# Allegro board kvp_03v3.brd
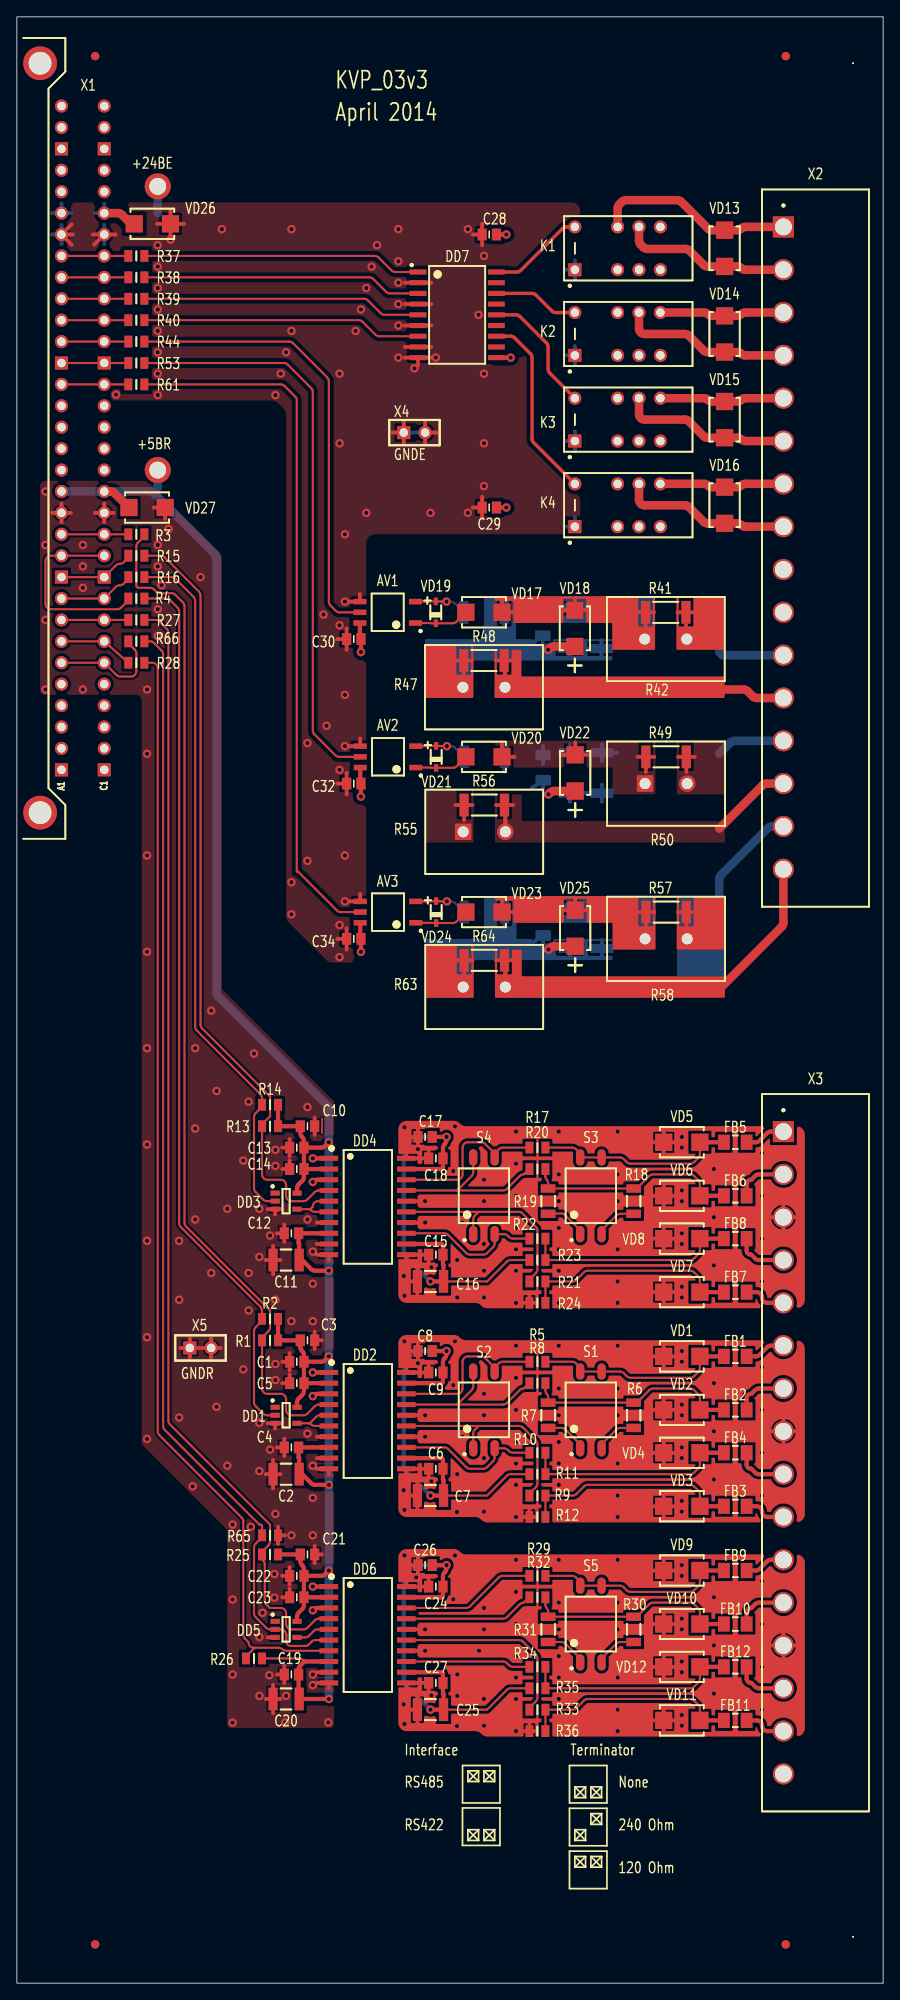
[diagram p0: board, top side]
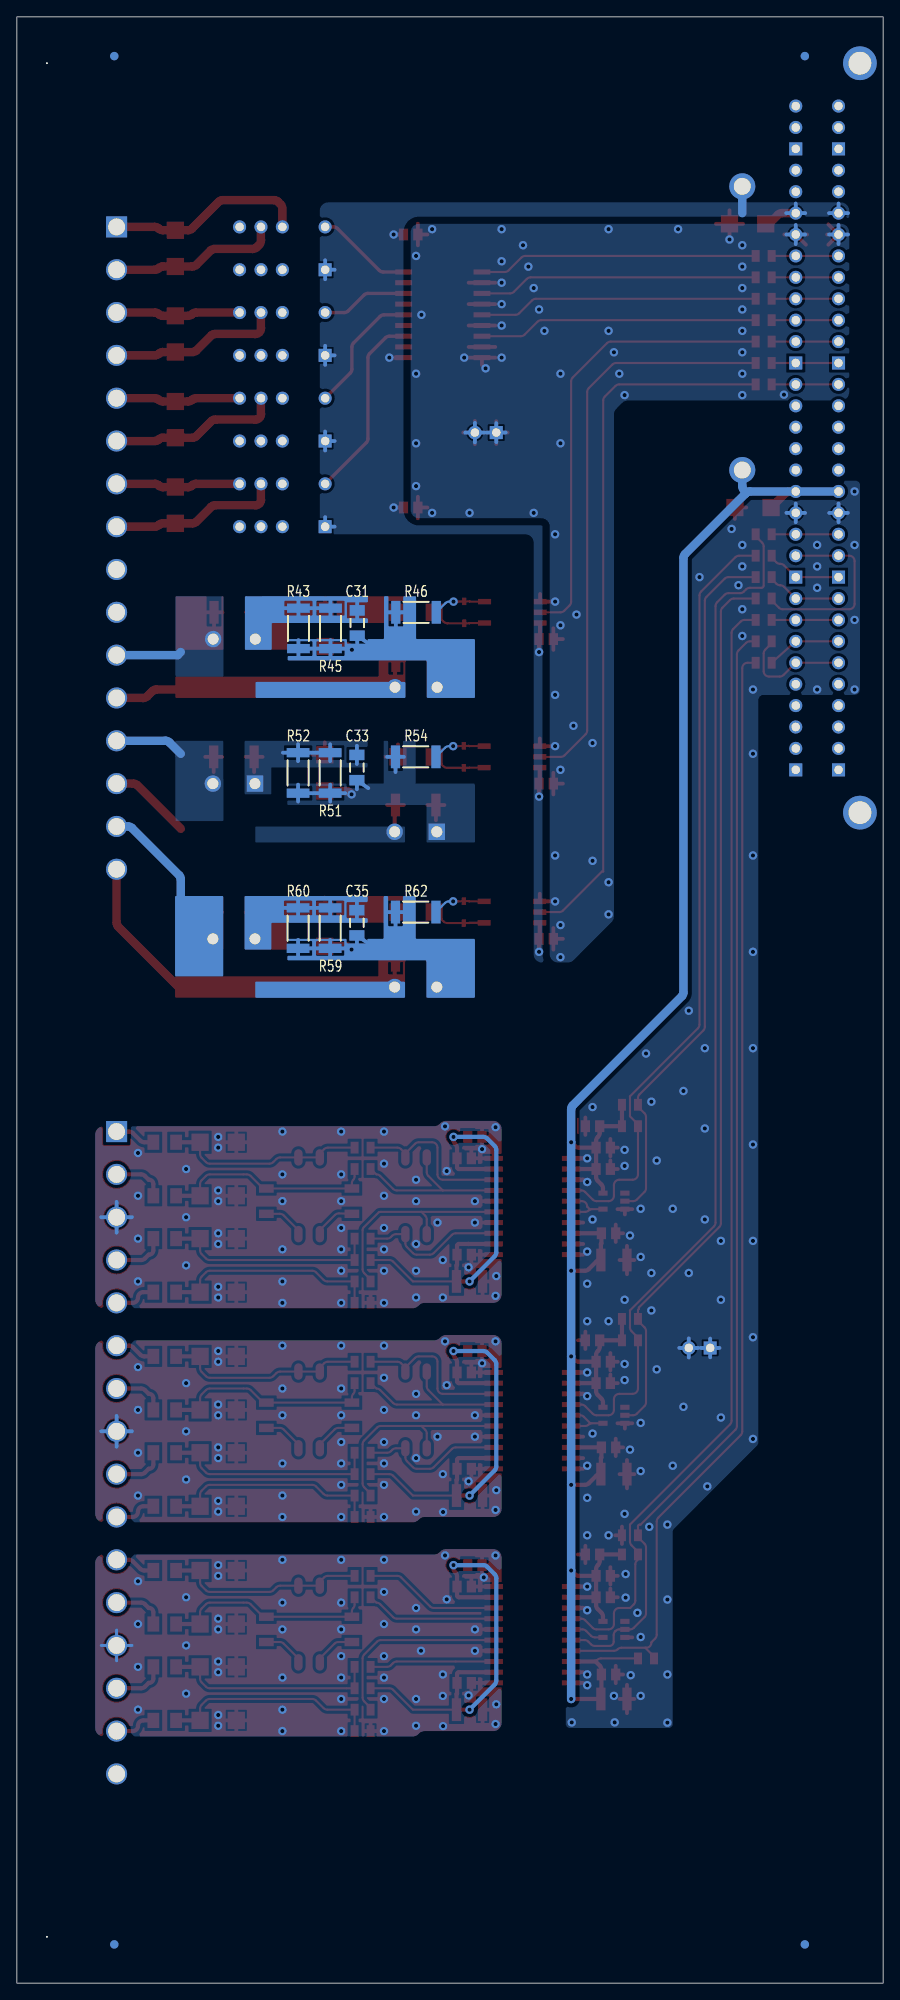
[diagram p1: board, bottom side, seen from below]

Outline 102.87 x 233.25 mm; copper layers: TOP, BOTTOM. Coordinates in mm from the lower left corner of the outline.
Outline path: rectangle 0,0 102.87,233.25

## Design rules (mm)
net group PWR: nets +5BR

## Placement (name value [footprint] x y rotation side)
AV1  ACPL-M50L-500E  [SOIC127P650X260-5]  44.04 162.61 180 top
AV2  ACPL-M50L-500E  [SOIC127P650X260-5]  44.08 145.47 180 top
AV3  ACPL-M50L-500E  [SOIC127P650X260-5]  44.08 127.05 180 top
C1  0.1u  [CAPC2013X95N]  33.24 73.71 180 top
C2  10.0u  [CAPC3225X220N]  31.97 60.38 180 top
C3  0.1u  [CAPC2013X95N]  34.51 76.25 0 top
C4  0.1u  [CAPC2013X95N]  32.61 63.55 180 top
C5  0.01u  [CAPC2013X95N]  33.24 71.17 180 top
C6  0.1u  [CAPC2013X95N]  49.75 61.01 180 top
C7  10.0u  [CAPC3225X220N]  49.12 57.84 180 top
C8  0.01u  [CAPC2013X95N]  48.48 74.98 180 top
C9  0.1u  [CAPC2013X95N]  49.75 72.44 180 top
C10  0.1u  [CAPC2013X95N]  34.51 101.65 0 top
C11  10.0u  [CAPC3225X220N]  31.97 85.78 180 top
C12  0.1u  [CAPC2013X95N]  32.61 88.95 180 top
C13  0.1u  [CAPC2013X95N]  33.24 99.11 180 top
C14  0.01u  [CAPC2013X95N]  33.24 96.57 180 top
C15  0.1u  [CAPC2013X95N]  49.75 86.41 180 top
C16  10.0u  [CAPC3225X220N]  49.12 83.24 180 top
C17  0.01u  [CAPC2013X95N]  48.48 100.38 180 top
C18  0.1u  [CAPC2013X95N]  49.75 97.84 180 top
C19  0.1u  [CAPC2013X95N]  32.61 36.62 180 top
C20  10.0u  [CAPC3225X220N]  31.97 33.71 180 top
C21  0.1u  [CAPC2013X95N]  34.51 50.85 0 top
C22  0.1u  [CAPC2013X95N]  33.24 48.31 180 top
C23  0.01u  [CAPC2013X95N]  33.24 45.77 180 top
C24  0.1u  [CAPC2013X95N]  49.75 47.04 180 top
C25  10.0u  [CAPC3225X220N]  49.12 32.44 180 top
C26  0.01u  [CAPC2013X95N]  48.48 49.58 180 top
C27  0.1u  [CAPC2013X95N]  49.75 35.61 180 top
C28  0.1u  [CAPC2013X95N]  56.1 207.43 180 top
C29  0.1u  [CAPC2013X95N]  56.1 175.05 180 top
C30  0.1u  [CAPC2013X95N]  40.01 159.44 180 top
C31  0.1u  [CAPC3216X145N]  62.45 161.34 270 bottom
C32  0.1u  [CAPC2013X95N]  40.01 142.29 180 top
C33  0.1u  [CAPC3216X145N]  62.49 144.2 270 bottom
C34  0.1u  [CAPC2013X95N]  40.01 123.88 180 top
C35  0.1u  [CAPC3216X145N]  62.49 125.78 270 bottom
DD1  SN74LVC1G14DBV  [SOT95P280X145-5N]  31.97 67.36 0 top
DD2  ADM2587  [SOIC127P1032X265-20]  37.05 72.44 270 top
DD3  SN74LVC1G14DBV  [SOT95P280X145-5N]  31.97 92.76 0 top
DD4  ADM2587  [SOIC127P1032X265-20]  37.05 97.84 270 top
DD5  SN74LVC1G14DBV  [SOT95P280X145-5N]  31.97 41.96 0 top
DD6  ADM2587  [SOIC127P1032X265-20]  37.05 47.04 270 top
DD7  ULN2803A  [SOIC127P1030X265-18N]  52.29 197.91 0 top
FB1  BLM31P  [FB3216X130N]  85.31 74.35 0 top
FB2  BLM31P  [FB3216X130N]  85.31 68 0 top
FB3  BLM31P  [FB3216X130N]  85.31 56.57 0 top
FB4  BLM31P  [FB3216X130N]  85.31 62.92 0 top
FB5  BLM31P  [FB3216X130N]  85.31 99.75 0 top
FB6  BLM31P  [FB3216X130N]  85.31 93.4 0 top
FB7  BLM31P  [FB3216X130N]  85.31 81.97 0 top
FB8  BLM31P  [FB3216X130N]  85.31 88.32 0 top
FB9  BLM31P  [FB3216X130N]  85.31 48.95 0 top
FB10  BLM31P  [FB3216X130N]  85.31 42.6 0 top
FB11  BLM31P  [FB3216X130N]  85.31 31.17 0 top
FB12  BLM31P  [FB3216X130N]  85.31 37.52 0 top
K1  FX2  [RELAY_FX2]  72.58 205.79 90 top
K2  FX2  [RELAY_FX2]  72.58 195.63 90 top
K3  FX2  [RELAY_FX2]  72.58 185.47 90 top
K4  FX2  [RELAY_FX2]  72.58 175.31 90 top
MH1  1.8mm  [MTG_180_310]  16.73 213.15 0 top
MH2  1.8mm  [MTG_180_310]  16.73 179.49 0 top
NOREF  -  [unnamed]  9.3 4.59 0 top
NOREF#2  -  [unnamed#2]  99.3 5.5 0 top
NOREF#3  -  [unnamed]  9.3 228.6 0 top
NOREF#4  -  [unnamed#2]  99.3 227.75 0 top
NOREF#5  -  [unnamed]  91.3 228.6 0 top
NOREF#6  -  [unnamed]  91.3 4.59 0 top
NOREF#7  -  [unnamed]  9.3 4.59 180 bottom
NOREF#8  -  [unnamed]  91.3 4.59 180 bottom
NOREF#9  -  [unnamed]  91.3 228.6 180 bottom
NOREF#10  -  [unnamed]  9.3 228.6 180 bottom
R1  10k  [RESC2013X60N]  30.06 76.25 0 top
R2  10k  [RESC2013X60N]  30.06 78.79 0 top
R3  100  [RESC2013X60N]  14.19 171.87 0 top
R4  100  [RESC2013X60N]  14.19 164.25 0 top
R5  10  [RESC2013X60N]  61.82 73.71 0 top
R6  240  [RESC3116X65N]  73.25 67.36 270 top
R7  240  [RESC3116X65N]  63.09 67.36 270 top
R8  10  [RESC2013X60N]  61.82 71.17 0 top
R9  10  [RESC2013X60N]  61.82 57.84 0 top
R10  10  [RESC2013X60N]  61.82 62.92 0 top
R11  470  [RESC2013X60N]  61.82 60.38 0 top
R12  470  [RESC2013X60N]  61.82 55.3 0 top
R13  10k  [RESC2013X60N]  30.06 101.65 0 top
R14  10k  [RESC2013X60N]  30.06 104.19 0 top
R15  100  [RESC2013X60N]  14.19 169.33 0 top
R16  100  [RESC2013X60N]  14.19 166.79 0 top
R17  10  [RESC2013X60N]  61.82 99.11 0 top
R18  240  [RESC3116X65N]  73.25 92.76 270 top
R19  240  [RESC3116X65N]  63.09 92.76 270 top
R20  10  [RESC2013X60N]  61.82 96.57 0 top
R21  10  [RESC2013X60N]  61.82 83.24 0 top
R22  10  [RESC2013X60N]  61.82 88.32 0 top
R23  470  [RESC2013X60N]  61.82 85.78 0 top
R24  470  [RESC2013X60N]  61.82 80.7 0 top
R25  10k  [RESC2013X60N]  30.06 50.85 0 top
R26  10k  [RESC2013X60N]  28.16 38.52 0 top
R27  100  [RESC2013X60N]  14.19 161.71 0 top
R28  100  [RESC2013X60N]  14.19 156.63 0 top
R29  10  [RESC2013X60N]  61.82 48.31 0 top
R30  240  [RESC3116X65N]  73.25 41.96 270 top
R31  240  [RESC3116X65N]  63.09 41.96 270 top
R32  10  [RESC2013X60N]  61.82 45.77 0 top
R33  10  [RESC2013X60N]  61.82 32.44 0 top
R34  10  [RESC2013X60N]  61.82 37.52 0 top
R35  470  [RESC2013X60N]  61.82 34.98 0 top
R36  470  [RESC2013X60N]  61.82 29.9 0 top
R37  6.2k  [RESC2013X60N]  14.19 204.89 0 top
R38  6.2k  [RESC2013X60N]  14.19 202.35 0 top
R39  6.2k  [RESC2013X60N]  14.19 199.81 0 top
R40  6.2k  [RESC2013X60N]  14.19 197.27 0 top
R41  470  [RESC5025X65N]  77.05 162.61 0 top
R42  5.1k  [RESV500P1300W900L2500H]  77.05 159.44 0 top
R43  1.2k  [RESC5025X65N]  69.44 160.71 90 bottom
R44  2k  [RESC2013X60N]  14.19 194.73 0 top
R45  1k  [RESC5025X65N]  65.62 160.71 90 bottom
R46  100  [RESC5025X65N]  55.47 162.61 0 bottom
R47  5.1k  [RESV500P1300W900L2500H]  55.47 153.72 0 top
R48  470  [RESC5025X65N]  55.47 156.9 0 top
R49  470  [RESC5025X65N]  77.09 145.47 0 top
R50  5.1k  [RESV500P1300W900L2500H]  77.09 142.29 0 top
R51  1k  [RESC5025X65N]  65.66 143.56 90 bottom
R52  1.2k  [RESC5025X65N]  69.47 143.56 90 bottom
R53  2k  [RESC2013X60N]  14.19 192.19 0 top
R54  100  [RESC5025X65N]  55.51 145.47 0 bottom
R55  5.1k  [RESV500P1300W900L2500H]  55.51 136.58 0 top
R56  470  [RESC5025X65N]  55.51 139.75 0 top
R57  470  [RESC5025X65N]  77.09 127.05 0 top
R58  5.1k  [RESV500P1300W900L2500H]  77.09 123.88 0 top
R59  1k  [RESC5025X65N]  65.66 125.15 90 bottom
R60  1.2k  [RESC5025X65N]  69.47 125.15 90 bottom
R61  2k  [RESC2013X60N]  14.19 189.65 0 top
R62  100  [RESC5025X65N]  55.51 127.05 0 bottom
R63  5.1k  [RESV500P1300W900L2500H]  55.51 118.16 0 top
R64  470  [RESC5025X65N]  55.51 121.34 0 top
R65  10k  [RESC2013X60N]  30.06 53.12 180 top
R66  100  [RESC2013X60N]  14.19 159.17 0 top
S1  SmWDL-02  [SW_SMWDL-02]  68.16 68 90 top
S2  SmWDL-02  [SW_SMWDL-02]  55.47 68 90 top
S3  SmWDL-02  [SW_SMWDL-02]  68.16 93.4 90 top
S4  SmWDL-02  [SW_SMWDL-02]  55.47 93.4 90 top
S5  SmWDL-02  [SW_SMWDL-02]  68.16 42.6 90 top
VD1  6.8B  [DIOM5236X261N_NP]  78.96 74.35 180 top
VD2  6.8B  [DIOM5236X261N_NP]  78.96 68 180 top
VD3  6.8B  [DIOM5236X261N_NP]  78.96 56.57 180 top
VD4  6.8B  [DIOM5236X261N_NP]  78.96 62.92 180 top
VD5  6.8B  [DIOM5236X261N_NP]  78.96 99.75 180 top
VD6  6.8B  [DIOM5236X261N_NP]  78.96 93.4 180 top
VD7  6.8B  [DIOM5236X261N_NP]  78.96 81.97 180 top
VD8  6.8B  [DIOM5236X261N_NP]  78.96 88.32 180 top
VD9  6.8B  [DIOM5236X261N_NP]  78.96 48.95 180 top
VD10  6.8B  [DIOM5236X261N_NP]  78.96 42.6 180 top
VD11  6.8B  [DIOM5236X261N_NP]  78.96 31.17 180 top
VD12  6.8B  [DIOM5236X261N_NP]  78.96 37.52 180 top
VD13  300B  [DIOM5236X261N_NP]  84.04 205.79 90 top
VD14  300B  [DIOM5236X261N_NP]  84.04 195.63 90 top
VD15  300B  [DIOM5236X261N_NP]  84.04 185.47 90 top
VD16  300B  [DIOM5236X261N_NP]  84.04 175.31 90 top
VD17  6.8B  [DIOM5236X261N_NP]  55.47 162.61 180 top
VD18  18B  [DIOM5236X261N]  66.26 160.71 270 top
VD19  1N4148WS  [SOD2513X100N]  49.75 162.61 90 top
VD20  6.8B  [DIOM5236X261N_NP]  55.47 145.47 180 top
VD21  1N4148WS  [SOD2513X100N]  49.79 145.47 90 top
VD22  18B  [DIOM5236X261N]  66.3 143.56 270 top
VD23  6.8B  [DIOM5236X261N_NP]  55.47 127.05 180 top
VD24  1N4148WS  [SOD2513X100N]  49.79 127.05 90 top
VD25  18B  [DIOM5236X261N]  66.3 125.15 270 top
VD26  30B  [DIOM5236X261N_NP]  16.09 208.7 0 top
VD27  6.8B  [DIOM5236X261N_NP]  15.46 175.05 0 top
X1  DIN-32x2  [DIN_41612_64_MR]  2.12 183.3 0 top
X2  231-576/001-000  [WAGO_231_576_001_000]  94.83 170.23 0 top
X3  231-576/001-000  [WAGO_231_576_001_000]  94.83 62.92 0 top
X4  GNDE  [HDRV1X2P254]  47.21 183.94 0 top
X5  GNDR  [HDRV1X2P254]  21.81 75.35 0 top

## Library data of the parts
AV1-AV3 = ACPL-M50L
C1-C35 = CAP_NP
DD1 DD3 DD5 = 74LVC1G14_g
DD2 DD4 DD6 = ADM2582E_RW20
DD7 = ULN2803A
FB1-FB12 = FERRITE
K1-K4 = RELAY_FX2
MH1 MH2 = MOUNTING_HOLE_PLATED
R1-R5 R8-R17 R20-R29 R32-R40 R44 R53 R61 R65 R66 = RES_0.125W
R6 R7 R18 R19 = RES_5.25W
R30 R31 = RES_4.25W
R41 R43 R45 R46 R48 R49 R51 R52 R54 R56 R57 R59 R60 R62 R64 = RES_0.5W
R42 R47 R50 R55 R58 R63 = RES_5W
S1-S5 = SWITCH_2
VD1-VD17 VD20 VD23 VD26 VD27 = DIODE_TVS_BI
VD18 VD22 VD25 = DIODE_TVS_UNI
VD19 VD21 VD24 = DIODE
X1 = CON_32X2
X2 X3 = CON_16
X4 X5 = CON_2

## Footprints (pads in the part's own frame, mm; a bottom-side part is the same pattern mirrored in y, then rotated)
CAPC2013X95N
  rect 1.1x1.4 smd: 1(-0.85,0) 2(0.85,0)
CAPC3216X145N
  rect 1.25x1.8 smd: 1(-1.5,0) 2(1.5,0)
CAPC3225X220N
  rect 1.1x2.7 smd: 1(-1.55,0) 2(1.55,0)
DIN_41612_64_MR
  rect 1.55x1.55 hole 1: A1(3.175,-39.37) A10(3.175,-16.51) A20(3.175,8.89) A30(3.175,34.29) C1(8.255,-39.37) C10(8.255,-16.51) C20(8.255,8.89) C30(8.255,34.29)
  round 1.55 hole 1: A2(3.175,-36.83) A3(3.175,-34.29) A4(3.175,-31.75) A5(3.175,-29.21) A6(3.175,-26.67) A7(3.175,-24.13) A8(3.175,-21.59) A9(3.175,-19.05) A11(3.175,-13.97) A12(3.175,-11.43) A13(3.175,-8.89) A14(3.175,-6.35) A15(3.175,-3.81) A16(3.175,-1.27) A17(3.175,1.27) A18(3.175,3.81) A19(3.175,6.35) A21(3.175,11.43) A22(3.175,13.97) A23(3.175,16.51) A24(3.175,19.05) A25(3.175,21.59) A26(3.175,24.13) A27(3.175,26.67) A28(3.175,29.21) A29(3.175,31.75) A31(3.175,36.83) A32(3.175,39.37) C2(8.255,-36.83) C3(8.255,-34.29) C4(8.255,-31.75) C5(8.255,-29.21) C6(8.255,-26.67) C7(8.255,-24.13) C8(8.255,-21.59) C9(8.255,-19.05) C11(8.255,-13.97) C12(8.255,-11.43) C13(8.255,-8.89) C14(8.255,-6.35) C15(8.255,-3.81) C16(8.255,-1.27) C17(8.255,1.27) C18(8.255,3.81) C19(8.255,6.35) C21(8.255,11.43) C22(8.255,13.97) C23(8.255,16.51) C24(8.255,19.05) C25(8.255,21.59) C26(8.255,24.13) C27(8.255,26.67) C28(8.255,29.21) C29(8.255,31.75) C31(8.255,36.83) C32(8.255,39.37)
  round 4 hole 2.7: HOLE1(0.635,-44.45) HOLE2(0.635,44.45)
DIOM5236X261N
  rect 2.05x2.05 smd: A(2.15,0) C(-2.15,0)
DIOM5236X261N_NP
  rect 2.05x2.05 smd: A(2.15,0) C(-2.15,0)
FB3216X130N
  rect 1.4x1.8 smd: 1(-1.35,0) 2(1.35,0)
HDRV1X2P254
  rect 1.55x1.55 hole 1: 1(-1.27,0)
  round 1.6 hole 1: 2(1.27,0)
MTG_180_310
  round 3.1 hole 2: 1(0,0)
RELAY_FX2
  rect 1.55x1.55 hole 1: 1(-2.54,6.32)
  round 1.55 hole 1: 3(-2.54,1.24) 4(-2.54,-1.3) 5(-2.54,-3.84) 6(2.54,-3.84) 7(2.54,-1.3) 8(2.54,1.24) 10(2.54,6.32)
RESC2013X60N
  rect 0.95x1.4 smd: 1(-0.95,0) 2(0.95,0)
RESC3116X65N
  rect 1x1.75 smd: 1(-1.5,0) 2(1.5,0)
RESC5025X65N
  rect 1.1x2.7 smd: 1(-2.4,0) 2(2.4,0)
RESV500P1300W900L2500H
  rect 1.95x1.95 hole 1.3: 1(-2.5,0)
  round 1.95 hole 1.3: 2(2.5,0)
SOD2513X100N
  rect 0.9x0.5 smd: A(1.3,0) C(-1.3,0)
SOIC127P650X260-5
  rect 1.55x0.65 smd: 1(-3.3,1.27) 3(-3.3,-1.27) 4(3.3,-1.27) 5(3.3,0) 6(3.3,1.27)
SOIC127P1030X265-18N
  rect 2x0.6 smd: 1(-4.65,5.08) 2(-4.65,3.81) 3(-4.65,2.54) 4(-4.65,1.27) 5(-4.65,0) 6(-4.65,-1.27) 7(-4.65,-2.54) 8(-4.65,-3.81) 9(-4.65,-5.08) 10(4.65,-5.08) 11(4.65,-3.81) 12(4.65,-2.54) 13(4.65,-1.27) 14(4.65,0) 15(4.65,1.27) 16(4.65,2.54) 17(4.65,3.81) 18(4.65,5.08)
SOIC127P1032X265-20
  rect 0.6x2.2 smd: 1(0,0) 2(1.27,0) 3(2.54,0) 4(3.81,0) 5(5.08,0) 6(6.35,0) 7(7.62,0) 8(8.89,0) 9(10.16,0) 10(11.43,0) 11(11.43,9.2) 12(10.16,9.2) 13(8.89,9.2) 14(7.62,9.2) 15(6.35,9.2) 16(5.08,9.2) 17(3.81,9.2) 18(2.54,9.2) 19(1.27,9.2) 20(0,9.2)
SOT95P280X145-5N
  rect 1.1x0.6 smd: 1(-1.3,0.95) 2(-1.3,0) 3(-1.3,-0.95) 4(1.3,-0.95) 5(1.3,0.95)
SW_SMWDL-02
  oval 1.95x1 smd: 1(-4.55,1.27) 2(-4.55,-1.27) 3(4.55,-1.27) 4(4.55,1.27)
unnamed
  round 1 smd: (0,0)
unnamed#2
  round 0.2 hole 2.7 unplated: (0,0)
WAGO_231_576_001_000
  rect 2.5x2.5 hole 2: 1(-3.81,38.1)
  round 2.5 hole 2: 2(-3.81,33.02) 3(-3.81,27.94) 4(-3.81,22.86) 5(-3.81,17.78) 6(-3.81,12.7) 7(-3.81,7.62) 8(-3.81,2.54) 9(-3.81,-2.54) 10(-3.81,-7.62) 11(-3.81,-12.7) 12(-3.81,-17.78) 13(-3.81,-22.86) 14(-3.81,-27.94) 15(-3.81,-33.02) 16(-3.81,-38.1)

## Nets
GNDE: AV1.4 AV2.4 AV3.4 C28.2 C29.2 C30.2 C32.2 C34.2 DD7.2(2B) DD7.4(4B) DD7.6(6B) DD7.8(8B) DD7.9(GND) VD26.A X1.A26 X1.C26 X4.1 X4.2
GNDR: C1.2 C2.2 C3.2 C4.2 C5.2 C10.2 C11.2 C12.2 C13.2 C14.2 C19.2 C20.2 C21.2 C22.2 C23.2 DD1.3(GND) DD2.1(GND1#0) DD2.3(GND1#1) DD2.7(TXD) DD2.9(GND1#2) DD2.10(GND1#3) DD3.3(GND) DD4.1(GND1#0) DD4.3(GND1#1) DD4.7(TXD) DD4.9(GND1#2) DD4.10(GND1#3) DD5.3(GND) DD6.1(GND1#0) DD6.3(GND1#1) DD6.9(GND1#2) DD6.10(GND1#3) R65.1 VD27.A X1.A13 X1.C13 X5.1 X5.2
1#B_A1: DD2.17(B\) R8.1 S2.4(ON)
1#B_A2: DD4.17(B\) R20.1 S4.4(ON)
1#B_A3: DD6.17(B\) R32.1
1#PRD: DD7.14(5C) K3.10(IN-)
1#PRM: DD7.12(7C) K4.10(IN-)
1#WARN: DD7.16(3C) K2.10(IN-)
1#Z_A1: DD2.15(Z\) R9.1 S2.1(N)
1#Z_A2: DD4.15(Z\) R21.1 S4.1(N)
1#Z_A3: DD6.15(Z\) R33.1
1A_A1: DD2.18(A) R5.1 S2.3(ON)
1A_A2: DD4.18(A) R17.1 S4.3(ON)
1A_A3: DD6.18(A) R29.1
1ALARM: DD7.18(1C) K1.10(IN-)
1Y_A1: DD2.13(Y) R10.1 S2.2(N)
1Y_A2: DD4.13(Y) R22.1 S4.2(N)
1Y_A3: DD6.13(Y) R34.1
#PRD: R39.1 X1.A23 X1.C23
#PRM: R40.1 X1.A22 X1.C22
#RE: DD5.4(OUT) DD6.5(R\E\)
#WARN: R38.1 X1.A24 X1.C24
+5BR: C1.1 C2.1 C3.1 C4.1 C5.1 C10.1 C11.1 C12.1 C13.1 C14.1 C19.1 C20.1 C21.1 C22.1 C23.1 DD1.5(VCC) DD2.2(VCC#0) DD2.8(VCC#1) DD3.5(VCC) DD4.2(VCC#0) DD4.8(VCC#1) DD5.5(VCC) DD6.2(VCC#0) DD6.8(VCC#1) MH2.1 R1.2 R2.2 R13.2 R14.2 R25.2 R26.2 VD27.C X1.A14 X1.C14
+24BE: AV1.6 AV2.6 AV3.6 C28.1 C29.1 C30.1 C32.1 C34.1 DD7.10(COM) K1.1(IN+) K2.1(IN+) K3.1(IN+) K4.1(IN+) MH1.1 VD26.C X1.A27 X1.C27
_#TXD_A1: DD1.4(OUT) DD2.5(R\E\) DD2.6(DE)
_#TXD_A2: DD3.4(OUT) DD4.5(R\E\) DD4.6(DE)
_#TXD_A3: DD6.7(TXD) R26.1 R28.2
_KCLR+: C33.1 R49.1 R50.1 R51.2 R52.2 VD20.C VD22.C
_KCLR-: C33.2 R51.1 R52.1 R54.2 R55.1 R56.1 VD22.A
_KPUSK+: C31.1 R41.1 R42.1 R43.2 R45.2 VD17.C VD18.C
_KPUSK-: C31.2 R43.1 R45.1 R46.2 R47.1 R48.1 VD18.A
_KTM+: C35.1 R57.1 R58.1 R59.2 R60.2 VD23.C VD25.C
_KTM-: C35.2 R59.1 R60.1 R62.2 R63.1 R64.1 VD25.A
_RXD_A1: DD2.4(RXD) R1.1 R3.2
_RXD_A2: DD4.4(RXD) R13.1 R15.2
_RXD_A3: DD6.4(RXD) R25.1 R27.2
ALARM: R37.1 X1.A25 X1.C25
CLEAR: R53.1 X1.A20 X1.C20
CTRLTM: R61.1 X1.A19 X1.C19
DE: DD5.2(IN) DD6.6(DE) R65.2 R66.2
ENDR: R66.1 X1.A6 X1.C6
KALARM+: K1.8(NC2) VD13.A X2.1
KALARM-: K1.7(02) VD13.C X2.2
KCLEAR+: R49.2 R50.2 X2.13
KCLEAR-: R55.2 R56.2 X2.14
KCTRLTM+: R57.2 R58.2 X2.15
KCTRLTM-: R63.2 R64.2 X2.16
KDR_COM: C24.2 C25.2 C26.2 C27.2 DD6.11(GND2#0) DD6.14(GND2#1) DD6.16(GND2#2) DD6.20(GND2#3) R36.1 VD9.A VD10.A VD11.A VD12.A X3.13
KLN_COM: C15.2 C16.2 C17.2 C18.2 DD4.11(GND2#0) DD4.14(GND2#1) DD4.16(GND2#2) DD4.20(GND2#3) R24.1 VD5.A VD6.A VD7.A VD8.A X3.3
KPRD+: K3.6(NO2) VD15.A X2.5
KPRD-: K3.7(02) VD15.C X2.6
KPRM+: K4.6(NO2) VD16.A X2.7
KPRM-: K4.7(02) VD16.C X2.8
KPUSK+: R41.2 R42.2 X2.11
KPUSK-: R47.2 R48.2 X2.12
KRXDR+: FB9.2 X3.11
KRXDR-: FB10.2 X3.12
KRXLN+: FB5.2 X3.1
KRXLN-: FB6.2 X3.2
KRXTM+: FB1.2 X3.6
KRXTM-: FB2.2 X3.7
KTM_COM: C6.2 C7.2 C8.2 C9.2 DD2.11(GND2#0) DD2.14(GND2#1) DD2.16(GND2#2) DD2.20(GND2#3) R12.1 VD1.A VD2.A VD3.A VD4.A X3.8
KTXDR+: FB12.2 X3.14
KTXDR-: FB11.2 X3.15
KTXLN+: FB8.2 X3.4
KTXLN-: FB7.2 X3.5
KTXTM+: FB4.2 X3.9
KTXTM-: FB3.2 X3.10
KWARN+: K2.6(NO2) VD14.A X2.3
KWARN-: K2.7(02) VD14.C X2.4
N42682_A1: DD1.2(IN) R2.1 R4.2
N42682_A2: DD3.2(IN) R14.1 R16.2
N48487_A1: FB3.1 R9.2 R12.2 VD3.C
N48487_A2: FB7.1 R21.2 R24.2 VD7.C
N48547_A1: FB2.1 R6.1 R7.1 R8.2 VD2.C
N48547_A2: FB6.1 R18.1 R19.1 R20.2 VD6.C
N48663_A1: FB1.1 R5.2 S1.3(ON) S1.4(ON) VD1.C
N48663_A2: FB5.1 R17.2 S3.3(ON) S3.4(ON) VD5.C
N48667_A1: FB4.1 R10.2 R11.2 VD4.C
N48667_A2: FB8.1 R22.2 R23.2 VD8.C
N48675_A1: R6.2 S1.2(N)
N48675_A2: R18.2 S3.2(N)
N102211_A1: R7.2 S1.1(N)
N102211_A2: R19.2 S3.1(N)
PUSK: R44.1 X1.A21 X1.C21
RXDR: R27.1 X1.A8 X1.C8
RXLN: R15.1 X1.A10 X1.C10
RXTM: R3.1 X1.A12 X1.C12
TXDR: R28.1 X1.A7 X1.C7
TXLN: R16.1 X1.A9 X1.C9
TXTM: R4.1 X1.A11 X1.C11
VISO_A1: C6.1 C7.1 C8.1 C9.1 DD2.12(VISOOUT) DD2.19(VISOIN) R11.1
VISO_A2: C15.1 C16.1 C17.1 C18.1 DD4.12(VISOOUT) DD4.19(VISOIN) R23.1
VISO_A3: C24.1 C25.1 C26.1 C27.1 DD6.12(VISOOUT) DD6.19(VISOIN) R35.1
N50971: DD7.1(1B) R37.2
N50975: DD7.3(3B) R38.2
N51011: DD7.5(5B) R39.2
N51031: DD7.7(7B) R40.2
N108473: FB11.1 R33.2 R36.2 VD11.C
N108609: FB10.1 R30.1 R31.1 R32.2 VD10.C
N108713: FB9.1 R29.2 S5.3(ON) S5.4(ON) VD9.C
N109567: FB12.1 R34.2 R35.2 VD12.C
N109907: R30.2 S5.2(N)
N114153: R31.2 S5.1(N)
N487123: AV1.5 R44.2
N487155: AV1.1 VD17.A VD19.C
N487159: AV1.3 R46.1 VD19.A
N493408: AV2.5 R53.2
N493440: AV2.1 VD20.A VD21.C
N493444: AV2.3 R54.1 VD21.A
N494431: AV3.5 R61.2
N494463: AV3.1 VD23.A VD24.C
N494467: AV3.3 R62.1 VD24.A

Pads without a net: DD1 1; DD3 1; DD5 1; DD7 11 13 15 17; K1 3 4 5 6; K2 3 4 5 8; K3 3 4 5 8; K4 3 4 5 8; X1 A1 A2 A3 A4 A5 A15 A16 A17 A18 A28 A29 A30 A31 A32 C1 C2 C3 C4 C5 C15 C16 C17 C18 C28 C29 C30 C31 C32 HOLE1 HOLE2; X2 9 10; X3 16

## Via types
v1: diameter 1, hole 0.5, TOP to BOTTOM, 323 vias

## Routing (per net, layer and track width the routed paths; a pad name or vN(x,y) marks a point on that pad's centre or on a via; arc(x,y) is an arc through that point)
GNDE: length 83.8
  TOP w0.45: 46.06,196.63 DD7.6 49.22,196.63 ; 39.16,158.16 C30.2 ; C30.2 38.03,159.44 ; C30.2 39.16,160.72 ; 40.77,147.64 AV2.4 39.42,146.74 ; 40.73,164.79 AV1.4 39.38,163.88 ; X4.2 49.86,183.94 ; X4.2 48.48,182.56 ; X4.2 48.48,185.31 ; 45.94,182.58 X4.1 ; X4.1 44.59,183.94 ; X4.1 45.94,185.29 ; 16.64,208.7 VD26.A ; VD26.A 18.25,207.1 ; VD26.A 18.25,210.3 ; VD26.A 19.85,208.7 ; 46.06,201.72 49.22,201.72 ; 49.22,194.09 DD7.8 46.06,194.09 ; 55.25,206.15 C28.2 ; C28.2 54.12,207.43 ; C28.2 55.25,208.71 ; 9.03,207.43 X1.C26 ; X1.C26 11.73,207.43 ; X1.C26 9.17,206.22 ; X1.A26 6.51,208.64 ; X1.A26 6.51,206.22 ; X1.A26 6.65,207.43 ; 46.06,192.83 DD7.9 ; DD7.9 47.64,191.95 ; DD7.9 49.22,192.83 ; C34.2 39.16,125.16 ; C34.2 38.03,123.88 ; C34.2 39.16,122.6 ; 46.06,199.18 49.22,199.18 ; C29.2 55.25,176.32 ; C29.2 55.25,173.77 ; C29.2 54.12,175.05 ; C32.2 39.16,143.57 ; C32.2 39.16,141.02 ; C32.2 38.03,142.29 ; 39.42,128.32 AV3.4 40.77,129.23
  BOTTOM w0.45: 48.48,182.78 X4.2 ; X4.2 47.33,183.94 ; X4.2 48.48,185.09 ; X4.2 49.63,183.94 ; X1.A26 5.3,208.56 ; X1.A26 4.17,207.43 ; X1.A26 6.43,207.43 ; X1.A26 5.3,206.3 ; X4.1 45.94,185.06 ; X4.1 44.81,183.94 ; X4.1 45.94,182.81 ; X4.1 47.07,183.94 ; 10.38,206.3 X1.C26 ; X1.C26 9.25,207.43 ; X1.C26 11.51,207.43 ; X1.C26 10.38,208.56
  vias: v1(11.78,188.43) v1(16.73,206.16) v1(16.73,203.62) v1(16.73,201.08) v1(16.73,198.54) v1(16.73,196) v1(16.73,193.46) v1(16.73,190.92) v1(16.73,188.38) v1(18.25,206.84) v1(24.35,208.06) v1(30.7,188.38) v1(31.34,190.92) v1(31.97,193.46) v1(32.61,208.06) v1(32.61,196) v1(32.61,130.59) v1(32.61,126.79) v1(34.51,147.11) v1(34.51,133.14) v1(36.41,162.34) v1(36.78,149.15) v1(38.32,190.92) v1(38.32,182.67) v1(38.32,161.08) v1(38.32,143.93) v1(38.32,125.52) v1(38.32,121.71) v1(38.95,171.87) v1(38.95,163.88) v1(38.95,152.82) v1(38.95,146.74) v1(38.95,133.77) v1(38.95,128.32) v1(40.23,196) v1(40.86,198.54) v1(41.49,201.08) v1(41.49,174.41) v1(42.13,203.62) v1(42.77,206.16) v1(45.3,208.06) v1(45.3,204.25) v1(45.3,201.72) v1(45.3,199.18) v1(45.3,196.63) v1(45.3,192.83) v1(47.21,191.56) v1(49.12,174.41) v1(49.75,192.83) v1(53.56,208.06) v1(53.56,174.41) v1(54.83,197.91) v1(55.47,204.89) v1(55.47,190.92) v1(55.47,182.67) v1(55.47,177.59)
GNDR: length 118.4
  TOP w0.45: DD1.3 31.55,66.41 ; DD1.3 30.67,65.79 ; DD1.3 29.79,66.41 ; 29.79,41.01 DD5.3 ; 19.44,75.35 X5.1 ; X5.1 20.54,76.45 ; X5.1 21.64,75.35 ; X5.1 20.54,74.25 ; 32.39,98.09 C13.2 ; C13.2 31.51,99.11 ; C13.2 32.39,100.14 ; 10.38,173.31 X1.C13 ; X1.C13 10.38,175.51 ; X1.C13 11.48,174.41 ; X1.C13 9.28,174.41 ; C12.2 31.76,89.98 ; C12.2 31.76,87.93 ; C12.2 30.88,88.95 ; 35.36,75.23 C3.2 ; C3.2 36.24,76.25 ; C3.2 35.36,77.28 ; 32.39,47.29 C22.2 ; C22.2 31.51,48.31 ; C22.2 32.39,49.34 ; 35.36,102.68 C10.2 35.36,100.62 ; C2.2 31.3,60.38 ; C2.2 30.42,62.06 ; C2.2 30.42,58.7 ; C2.2 29.54,60.38 ; 30.88,63.55 C4.2 ; C4.2 31.76,62.53 ; C4.2 31.76,64.58 ; 31.51,73.71 C1.2 ; C1.2 32.39,74.74 ; C1.2 32.39,72.69 ; 23.08,74.22 X5.2 ; X5.2 21.95,75.35 ; X5.2 23.08,76.48 ; X5.2 24.21,75.35 ; 35.62,36.88 DD6.9 ; 29.54,85.78 C11.2 ; C11.2 30.42,87.46 ; C11.2 31.3,85.78 ; C11.2 30.42,84.1 ; 31.51,71.17 C5.2 32.39,72.2 ; 5.3,173.31 X1.A13 ; X1.A13 6.4,174.41 ; X1.A13 5.3,175.51 ; X1.A13 4.2,174.41 ; 35.62,61.01 DD2.10 37.05,60.39 ; 37.05,85.78 DD4.10 35.62,86.41 ; C20.2 30.42,35.39 ; C20.2 30.42,32.03 ; C20.2 31.3,33.71 ; C20.2 29.54,33.71 ; 17.61,173.69 VD27.A 16.26,175.05 ; 31.51,45.77 C23.2 32.39,46.8 ; C19.2 31.76,37.64 ; C19.2 30.88,36.62 ; C19.2 31.76,35.59 ; 29.79,91.81 DD3.3 ; DD3.3 30.67,91.19 ; DD3.3 31.55,91.81 ; 35.62,62.28 DD2.9 ; 31.02,53.12 31.82,53.12 ; 31.02,53.12 31.02,54.15 ; 31.02,53.12 31.02,52.1 ; 35.36,49.83 C21.2 ; C21.2 35.36,51.88 ; C21.2 36.24,50.85 ; 32.39,97.6 C14.2 31.51,96.57 ; 35.62,64.82 DD2.7 ; 35.62,90.22 DD4.7 ; 37.05,34.99 DD6.10 35.62,35.61 ; 35.62,87.68 DD4.9
  TOP w0.5: v1(35.15,95.03) 35.23,95.12 arc(35.43,95.26) 35.68,95.3 DD4.3 ; v1(35.15,44.24) 35.23,44.32 arc(35.43,44.46) 35.68,44.5 DD6.3 ; DD6.1 v1(35.15,47.04) ; DD2.3 35.68,69.9 arc(35.43,69.86) 35.23,69.72 v1(35.15,69.64) ; DD2.1 v1(35.15,72.44) ; DD4.1 v1(35.15,97.84)
  BOTTOM w0.45: 20.54,74.25 X5.1 ; X5.1 21.64,75.35 ; X5.1 20.54,76.45 ; X5.1 19.44,75.35 ; X1.A13 6.4,174.41 ; X1.A13 5.3,173.31 ; X1.A13 4.2,174.41 ; X1.A13 5.3,175.51 ; X5.2 23.08,76.48 ; X5.2 24.21,75.35 ; X5.2 23.08,74.22 ; X5.2 21.95,75.35 ; 10.38,173.31 X1.C13 ; X1.C13 9.28,174.41 ; X1.C13 11.48,174.41 ; X1.C13 10.38,175.51
  vias: v1(3.4,176.95) v1(3.4,170.6) v1(3.4,161.71) v1(3.4,153.46) v1(7.84,170.6) v1(7.84,168.06) v1(7.84,165.52) v1(7.84,153.46) v1(15.46,153.46) v1(15.46,145.84) v1(15.46,133.77) v1(15.46,122.34) v1(15.46,110.91) v1(15.46,99.48) v1(15.46,88.05) v1(15.46,76.62) v1(15.46,64.56) v1(16.73,170.6) v1(16.73,168.06) v1(16.73,162.98) v1(16.73,159.81) v1(17.18,165.83) v1(18,172.5) v1(19.27,88.05) v1(19.27,81.06) v1(19.27,67.1) v1(20.88,58.93) v1(21.18,110.91) v1(21.18,101.39) v1(21.18,90.59) v1(21.81,166.79) v1(23.08,115.36) v1(23.08,84.24) v1(23.72,105.83) v1(23.72,68.37) v1(24.98,91.86) v1(24.98,61.38) v1(25.62,54.4) v1(25.62,45.51) v1(25.62,36.62) v1(25.62,30.9) v1(26.89,97.58) v1(26.89,72.81) v1(27.52,104.56) v1(27.52,84.24) v1(27.52,79.8) v1(27.78,54.13) v1(28.16,110.28) v1(28.8,91.86) v1(28.8,86.15) v1(28.8,66.46) v1(28.8,60.75) v1(28.8,41.06) v1(28.8,34.08) v1(29.18,43.93) v1(29.98,36.53) v1(30.06,88.69) v1(30.06,63.29) v1(30.58,48.53) v1(30.58,45.73) v1(30.7,98.84) v1(30.7,96.94) v1(30.7,81.06) v1(30.7,73.45) v1(30.7,71.54) v1(30.7,55.67) v1(31.88,30.93) v1(31.97,34.08) v1(32.61,78.53) v1(32.61,53.12) v1(34.51,103.93) v1(34.51,90.59) v1(34.51,65.19) v1(35.15,86.78) v1(35.15,82.97) v1(35.15,78.53) v1(35.15,61.38) v1(35.15,57.57) v1(35.15,53.12) v1(35.15,36.62) v1(35.15,35.35) v1(36.98,30.93)
1#B_A1: length 20.3
  TOP w0.25: 52.29,68.63 54.01,70.35 arc(54.15,70.56) 54.2,70.8 S2.4 ; 52.29,68.63 57.74,68.63 arc(57.98,68.68) 58.19,68.82 59.72,70.35 arc(59.93,70.49) 60.17,70.54 R8.1 ; 52.29,68.63 DD2.17
1#B_A2: length 20.3
  TOP w0.25: R20.1 60.17,95.94 arc(59.93,95.89) 59.72,95.75 58.19,94.22 arc(57.98,94.08) 57.74,94.03 52.29,94.03 ; 52.29,94.03 DD4.17 ; 52.29,94.03 54.01,95.75 arc(54.15,95.96) 54.2,96.2 S4.4
1#B_A3: length 15.6
  TOP w0.25: R32.1 60.17,45.14 arc(59.93,45.09) 59.72,44.95 58.19,43.42 arc(57.98,43.28) 57.74,43.23 DD6.17
1#PRD: length 15.2
  TOP w0.4: DD7.14 59.28,197.91 arc(59.52,197.86) 59.73,197.72 62.9,194.55 arc(63.04,194.34) 63.09,194.1 63.09,191.45 arc(63.13,191.21) 63.27,191 K3.10
1#PRM: length 22.4
  TOP w0.4: DD7.12 58.65,195.37 arc(58.89,195.32) 59.1,195.18 60.99,193.28 arc(61.13,193.07) 61.18,192.83 61.18,183.2 arc(61.23,182.95) 61.37,182.75 K4.10
1#WARN: length 10.2
  TOP w0.4: DD7.16 61.19,200.44 arc(61.43,200.4) 61.64,200.26 63.53,198.36 arc(63.74,198.22) 63.98,198.17 K2.10
1#Z_A1: length 25.9
  TOP w0.25: S2.1 54.2,65.2 arc(54.24,65.44) 54.38,65.65 54.83,66.09 ; 54.83,66.09 DD2.15 ; 54.83,66.09 59.65,66.09 arc(59.89,66.05) 60.1,65.91 61.63,64.38 arc(61.77,64.17) 61.82,63.93 61.82,59.28 arc(61.77,59.03) 61.63,58.83 61.02,58.22 arc(60.91,58.05) R9.1
1#Z_A2: length 25.9
  TOP w0.25: DD4.15 54.83,91.49 ; 54.83,91.49 54.38,91.05 arc(54.24,90.84) 54.2,90.6 S4.1 ; 54.83,91.49 59.65,91.49 arc(59.77,91.48) 59.89,91.45 61.68,89.66 arc(61.78,89.51) 61.82,89.33 61.82,84.68 arc(61.77,84.43) 61.63,84.23 61.02,83.62 arc(60.91,83.45) R21.1
1#Z_A3: length 23
  TOP w0.25: DD6.15 59.65,40.69 arc(59.89,40.65) 60.1,40.51 61.63,38.98 arc(61.77,38.77) 61.82,38.53 61.82,33.88 arc(61.77,33.63) 61.63,33.43 61.02,32.82 arc(60.91,32.65) R33.1
1A_A1: length 20
  TOP w0.25: DD2.18 52.29,69.9 arc(52.74,70.09) 52.93,70.54 52.93,73.71 arc(53.11,74.16) 53.56,74.35 55.15,74.35 arc(55.39,74.3) 55.6,74.16 56.55,73.21 arc(56.69,73) 56.73,72.76 ; 56.73,72.76 S2.3 ; 56.73,72.76 arc(56.78,73) 56.92,73.21 57.24,73.53 arc(57.44,73.67) 57.69,73.71 R5.1
1A_A2: length 20
  TOP w0.25: DD4.18 52.29,95.3 arc(52.74,95.49) 52.93,95.94 52.93,99.11 arc(53.11,99.56) 53.56,99.75 55.15,99.75 arc(55.39,99.7) 55.6,99.56 56.55,98.61 arc(56.69,98.4) 56.73,98.16 ; 56.73,98.16 S4.3 ; 56.73,98.16 arc(56.78,98.4) 56.92,98.61 57.24,98.93 arc(57.44,99.07) 57.69,99.11 R17.1
1A_A3: length 16.1
  TOP w0.25: DD6.18 53.35,44.5 arc(53.6,44.55) 53.8,44.69 57.24,48.13 arc(57.45,48.27) 57.69,48.31 R29.1
1ALARM: length 11.5
  TOP w0.4: DD7.18 59.38,202.99 arc(59.62,203.03) 59.83,203.17 64.8,208.15 arc(65.01,208.29) 65.25,208.33 K1.10
1Y_A1: length 17.5
  TOP w0.25: R10.1 58.9,62.92 arc(58.66,62.97) 58.45,63.11 58.3,63.26 arc(58.09,63.4) 57.85,63.45 S2.2 56.73,62.36 arc(56.69,62.12) 56.55,61.91 55.84,61.2 arc(55.63,61.06) 55.39,61.01 53.82,61.01 arc(53.58,61.06) 53.37,61.2 51.21,63.37 arc(51,63.51) 50.76,63.55 DD2.13
1Y_A2: length 17.5
  TOP w0.25: DD4.13 50.76,88.95 arc(51,88.91) 51.21,88.77 53.37,86.6 arc(53.58,86.46) 53.82,86.41 55.39,86.41 arc(55.63,86.46) 55.84,86.6 56.55,87.31 arc(56.69,87.52) 56.73,87.76 S4.2 57.85,88.85 arc(58.09,88.8) 58.3,88.66 58.45,88.51 arc(58.66,88.37) 58.9,88.32 R22.1
1Y_A3: length 14.8
  TOP w0.25: DD6.13 57.74,38.15 arc(57.99,38.11) 58.19,37.97 58.45,37.71 arc(58.66,37.57) 58.9,37.52 R34.1
#PRD: length 7.9
  TOP w0.25: R39.1 X1.C23 X1.A23
#PRM: length 7.9
  TOP w0.25: X1.A22 X1.C22 R40.1
#RE: length 4.1
  TOP w0.25: DD5.4 34.24,41.01 arc(34.48,41.06) 34.69,41.2 35.26,41.78 arc(35.47,41.92) 35.71,41.96 DD6.5
#WARN: length 7.9
  TOP w0.25: R38.1 X1.C24 X1.A24
+5BR: length 263.7
  TOP w0.25: 34.14,38.15 33.96,38.33 arc(33.76,38.47) 33.52,38.52 R26.2
  TOP w0.5: C14.1 34.09,95.64 arc(34.04,95.39) 33.9,95.19 33.46,94.74 arc(33.32,94.53) 33.27,94.29 DD3.5 ; C14.1 C13.1 ; C14.1 DD4.2 ; 31.02,50.85 C21.1 33.66,50.06 arc(33.71,49.82) 33.85,49.61 33.9,49.56 arc(34.04,49.35) 34.09,49.11 C22.1 ; v1(37.05,33.71) C20.1 33.45,33.77 C19.1 33.45,37.2 arc(33.5,37.45) 33.64,37.65 34.14,38.15 DD6.8 ; C23.1 34.09,44.84 arc(34.04,44.59) 33.9,44.39 33.46,43.94 arc(33.32,43.73) 33.27,43.49 DD5.5 ; C23.1 DD6.2 ; C23.1 C22.1 ; C13.1 34.09,99.91 arc(34.04,100.15) 33.9,100.36 33.85,100.41 arc(33.71,100.62) 33.66,100.86 C10.1 31.02,101.65 31.02,104.19 ; C13.1 36.15,99.11 arc(36.4,99.16) 36.6,99.3 v1(37.05,99.75) ; DD2.8 C4.1 33.45,62.35 33.52,62.29 C2.1 33.61,60.38 arc(33.86,60.33) 34.06,60.19 34.96,59.3 arc(35.17,59.16) 35.41,59.11 v1(37.05,59.11) ; v1(37.05,48.95) 36.6,48.5 arc(36.4,48.36) 36.15,48.31 C22.1 ; C5.1 C1.1 ; C5.1 DD2.2 ; C5.1 34.09,70.24 arc(34.04,69.99) 33.9,69.79 33.46,69.34 arc(33.32,69.13) 33.27,68.89 DD1.5 ; C1.1 34.09,74.51 arc(34.04,74.75) 33.9,74.96 33.85,75.01 arc(33.71,75.22) 33.66,75.46 C3.1 31.02,76.25 31.02,78.79 ; C1.1 36.15,73.71 arc(36.4,73.76) 36.6,73.9 v1(37.05,74.35) ; DD4.8 C12.1 33.45,87.75 33.52,87.69 C11.1 33.61,85.78 arc(33.86,85.73) 34.06,85.59 34.96,84.7 arc(35.17,84.56) 35.41,84.51 v1(37.05,84.51)
  TOP w1: VD27.C 11.59,176.76 arc(11.39,176.9) 11.14,176.95 X1.C14
  BOTTOM w1: 16.36,176.68 23.53,169.52 arc(23.67,169.31) 23.72,169.07 23.72,117.52 arc(23.76,117.28) 23.9,117.07 36.86,104.11 arc(37,103.91) 37.05,103.66 v1(37.05,99.75) v1(37.05,84.51) v1(37.05,74.35) v1(37.05,59.11) v1(37.05,48.95) v1(37.05,33.71) ; 16.36,176.68 16.28,176.76 arc(16.08,176.9) 15.83,176.95 X1.C14 X1.A14 ; 16.36,176.68 16.36,176.69 arc(16.41,176.93) 16.55,177.13 arc(16.68,177.34) 16.73,177.58 MH2.1
+24BE: length 40.9
  TOP w0.5: v1(40.86,140.75) C32.1 40.77,142.38 40.77,144.2 ; AV1.6 40.73,159.74 arc(40.77,159.58) 40.86,159.44 C30.1 v1(40.86,157.9) ; C28.1 v1(58.13,207.43) ; v1(40.86,122.34) C34.1 40.77,123.96 AV3.6 ; DD7.10 v1(58.64,192.83) ; C29.1 v1(58.13,175.05)
  TOP w1: X1.C27 12.02,209.97 arc(12.27,209.92) 12.47,209.78 13.37,208.89 arc(13.58,208.75) 13.82,208.7 VD26.C
  BOTTOM w0.45: 66.26,181.81 K3.1 ; K3.1 66.26,184.06 ; K3.1 65.13,182.93 ; X1.C27 11.51,209.97 ; X1.C27 10.38,211.1 ; X1.C27 9.25,209.97 ; 65.13,203.25 K1.1 ; K1.1 66.26,202.12 ; K1.1 66.26,204.38 ; 65.13,193.09 K2.1 ; K2.1 66.26,191.97 ; K2.1 66.26,194.22 ; 66.26,173.9 K4.1 65.13,172.77 ; 4.17,209.97 X1.A27 ; X1.A27 5.3,211.1 ; X1.A27 6.43,209.97
  BOTTOM w1: MH1.1 16.73,209.97
_#TXD_A1: length 6.5
  TOP w0.25: DD2.6 35.37,66.09 arc(35.16,66.14) 34.98,66.25 arc(34.88,66.34) 34.75,66.39 ; DD2.5 35.99,67.36 arc(35.74,67.32) 35.54,67.18 34.75,66.39 ; DD1.4 34.6,66.41 arc(34.68,66.41) 34.75,66.39
_#TXD_A2: length 6.6
  TOP w0.25: DD4.6 35.37,91.49 arc(35.16,91.54) 34.98,91.65 arc(34.9,91.72) 34.81,91.77 ; DD3.4 34.6,91.81 arc(34.71,91.8) 34.81,91.77 ; DD4.5 35.78,92.76 arc(35.33,92.58) 35.15,92.13 35.15,92.11 34.81,91.77
_#TXD_A3: length 133.6
  TOP w0.25: R28.2 16.09,156.63 arc(16.54,156.44) 16.73,156 16.73,65.45 arc(16.78,65.21) 16.92,65 26.7,55.22 arc(26.84,55.01) 26.89,54.77 26.89,41.32 arc(26.94,41.08) 27.08,40.87 27.52,40.43 27.52,40.39 arc(27.7,39.96) 28.12,39.79 28.26,39.79 ; 28.26,39.79 27.37,38.9 arc(27.25,38.73) R26.1 ; 28.26,39.79 31.08,39.79 arc(31.32,39.74) 31.52,39.61 arc(31.72,39.47) 31.96,39.42 DD6.7
_KCLR+: length 22.8
  TOP w0.45: 73.69,145.47 R49.1 ; R49.1 75.7,145.47 ; R49.1 74.69,143.67 ; 59.09,145.47 57.62,145.47 57.62,146.95 ; VD22.C 67.78,145.71 ; VD22.C 66.3,147.19 ; VD22.C 64.82,145.71
  BOTTOM w0.45: R51.2 67.47,145.96 ; R51.2 65.66,144.96 ; R51.2 65.66,146.97 ; 62.49,144.62 62.49,146.78 ; R52.2 69.47,146.97 ; R52.2 67.67,145.96 ; R52.2 69.47,144.96 ; R52.2 71.28,145.96
_KCLR-: length 23.1
  TOP w0.45: 53.11,137.95 R56.1 ; R56.1 52.1,139.75 ; R56.1 54.11,139.75
  TOP w1: v1(63.12,141.02) 63.33,141.23 arc(63.53,141.37) 63.78,141.41 VD22.A
  BOTTOM w0.45: R52.1 69.47,142.17 ; R52.1 69.47,140.16 ; R52.1 67.67,141.16 ; 61.14,141.76 62.49,142.7 62.49,141.62 ; 57.91,143.67 R54.2 ; R54.2 58.91,145.47 ; R54.2 56.9,145.47 ; 65.66,140.16 R51.1 ; R51.1 65.66,142.17 ; R51.1 67.47,141.16 ; R51.1 63.86,141.16
  BOTTOM w0.5: R55.1 52.97,136.62
_KPUSK+: length 22.8
  TOP w0.45: 73.65,162.61 74.66,162.61 ; 74.66,162.61 75.66,162.61 ; 74.66,162.61 74.66,160.81 ; VD18.C 66.26,164.34 ; VD18.C 64.78,162.86 ; VD18.C 67.74,162.86 ; 57.62,164.09 VD17.C 59.09,162.61
  BOTTOM w0.45: 67.63,163.11 R43.2 ; R43.2 69.44,164.11 ; R43.2 69.44,162.11 ; R43.2 71.24,163.11 ; R45.2 65.62,164.11 ; R45.2 65.62,162.11 ; R45.2 67.43,163.11 ; 62.45,161.77 C31.1 62.45,163.92
_KPUSK-: length 23.1
  TOP w0.45: 53.07,155.09 R48.1 ; R48.1 54.07,156.9 ; R48.1 52.06,156.9
  TOP w1: VD18.A 63.74,158.56 arc(63.49,158.51) 63.29,158.37 v1(63.09,158.17)
  BOTTOM w0.45: 57.87,160.81 R46.2 ; R46.2 56.86,162.61 ; R46.2 58.87,162.61 ; 67.63,158.31 R43.1 ; R43.1 69.44,157.31 ; R43.1 69.44,159.31 ; R45.1 65.62,159.31 ; R45.1 67.43,158.31 ; R45.1 63.82,158.31 ; R45.1 65.62,157.31 ; 62.45,158.77 C31.2 61.1,158.9
  BOTTOM w0.5: R47.1 52.93,153.76
_KTM+: length 22.8
  TOP w0.45: 59.09,127.05 VD23.C 57.62,128.53 ; 64.82,127.3 VD25.C ; VD25.C 66.3,128.78 ; VD25.C 67.78,127.3 ; 74.69,125.25 R57.1 ; R57.1 73.69,127.05 ; R57.1 75.7,127.05
  BOTTOM w0.45: 62.49,128.36 C35.1 62.49,126.21 ; R60.2 71.28,127.55 ; R60.2 69.47,126.55 ; R60.2 69.47,128.55 ; R60.2 67.67,127.55 ; 65.66,126.55 R59.2 ; R59.2 67.47,127.55 ; R59.2 65.66,128.55
_KTM-: length 23.1
  TOP w0.45: 53.11,119.54 R64.1 ; R64.1 54.11,121.34 ; R64.1 52.1,121.34
  TOP w1: 66.3,123 63.78,123 arc(63.53,122.95) 63.33,122.81 v1(63.12,122.61)
  BOTTOM w0.45: 56.9,127.05 R62.2 ; R62.2 57.91,125.25 ; R62.2 58.91,127.05 ; R59.1 65.66,123.75 ; R59.1 65.66,121.75 ; R59.1 67.47,122.75 ; R59.1 63.86,122.75 ; R60.1 69.47,123.75 ; R60.1 69.47,121.75 ; R60.1 67.67,122.75 ; 61.14,123.34 C35.2 62.49,123.21
  BOTTOM w0.5: R63.1 52.97,118.2
_RXD_A1: length 121.3
  TOP w0.25: DD2.4 35.84,68.63 arc(35.59,68.59) 35.39,68.45 34.49,67.55 arc(34.28,67.41) 34.04,67.36 32.61,67.36 arc(32.16,67.55) 31.97,68 31.97,69.27 arc(31.78,69.72) 31.34,69.9 29.75,69.9 arc(29.3,70.09) 29.12,70.54 R1.1 29.12,76.31 arc(29.16,76.55) 29.3,76.76 29.88,77.34 arc(30.02,77.54) 30.06,77.79 30.06,79.8 20.09,89.77 arc(19.95,89.98) 19.91,90.22 19.91,163.35 arc(19.86,163.6) 19.72,163.8 18.82,164.7 arc(18.61,164.84) 18.37,164.88 16.99,164.88 arc(16.75,164.93) 16.54,165.07 16.28,165.33 arc(16.07,165.47) 15.83,165.52 14.44,165.52 arc(14.26,165.59) 14.19,165.77 14.19,170.43 arc(14.24,170.68) 14.38,170.88 14.98,171.49 arc(15.1,171.66) R3.2
_RXD_A2: length 92
  TOP w0.25: R15.2 17.1,169.33 arc(17.35,169.28) 17.55,169.14 21.62,165.07 arc(21.76,164.86) 21.81,164.62 21.81,113.71 arc(21.86,113.47) 22,113.26 30.06,105.2 30.06,102.83 29.12,101.88 R13.1 29.12,95.94 arc(29.3,95.49) 29.75,95.3 31.34,95.3 arc(31.78,95.12) 31.97,94.67 31.97,93.4 arc(32.16,92.95) 32.61,92.76 34.04,92.76 arc(34.28,92.81) 34.49,92.95 35.39,93.85 arc(35.59,93.99) 35.84,94.03 DD4.4
_RXD_A3: length 134.4
  TOP w0.25: DD6.4 35.84,43.23 arc(35.59,43.19) 35.39,43.05 34.49,42.15 arc(34.28,42.01) 34.04,41.96 32.61,41.96 arc(32.16,42.15) 31.97,42.6 31.97,43.87 arc(31.78,44.32) 31.34,44.5 30.04,44.5 29.62,44.93 arc(29.48,45.13) 29.43,45.37 29.43,49.69 arc(29.38,49.93) 29.24,50.14 29.12,50.27 R25.1 29.12,50.91 arc(29.16,51.15) 29.3,51.36 29.88,51.94 arc(30.02,52.14) 30.06,52.39 30.06,54.4 18.19,66.27 arc(18.05,66.48) 18,66.72 18,160.18 arc(17.95,160.42) 17.81,160.63 16.92,161.52 arc(16.71,161.66) 16.47,161.71 R27.2
ALARM: length 7.9
  TOP w0.25: R37.1 X1.C25 X1.A25
CLEAR: length 7.9
  TOP w0.25: X1.A20 X1.C20 R53.1
CTRLTM: length 7.9
  TOP w0.25: R61.1 X1.C19 X1.A19
DE: length 133.5
  TOP w0.25: R66.2 15.83,159.17 arc(16.07,159.12) 16.28,158.98 17.18,158.09 arc(17.32,157.88) 17.37,157.64 17.37,66.09 arc(17.41,65.85) 17.55,65.64 28.8,54.4 28.92,54.4 arc(29.06,54.34) 29.12,54.2 R65.2 arc(29.07,52.92) 28.96,52.74 28.35,52.13 arc(28.21,51.93) 28.16,51.68 28.16,43.86 arc(28.21,43.62) 28.35,43.41 29.61,42.15 arc(29.82,42.01) 30.06,41.96 DD5.2 31.33,41.96 arc(31.58,41.92) 31.78,41.78 31.81,41.75 arc(31.95,41.54) 32,41.3 32,40.5 arc(32.15,40.15) 32.5,40 34.24,40 arc(34.48,40.05) 34.69,40.19 35.01,40.51 arc(35.21,40.65) 35.46,40.69 DD6.6
ENDR: length 13.8
  TOP w0.25: X1.A6 X1.C6 11.83,155.18 arc(12.04,155.04) 12.28,154.99 13.55,154.99 arc(14,155.18) 14.19,155.63 14.19,157.73 arc(14.14,157.97) 14,158.18 13.4,158.79 arc(13.28,158.96) R66.1
KALARM+: length 23.9
  TOP w1: K1.8 71.34,210.54 arc(71.39,210.78) 71.53,210.99 71.86,211.32 arc(72.07,211.46) 72.31,211.51 78.44,211.51 arc(78.68,211.46) 78.89,211.32 82.08,208.13 arc(82.29,207.99) 82.53,207.94 VD13.A 85.55,207.94 arc(85.79,207.99) 86,208.13 86.02,208.15 arc(86.22,208.29) 86.47,208.33 X2.1
KALARM-: length 20.2
  TOP w1: K1.7 73.88,206.69 arc(73.93,206.45) 74.07,206.24 74.4,205.91 arc(74.61,205.77) 74.85,205.72 79.41,205.72 arc(79.65,205.67) 79.85,205.53 81.56,203.83 arc(81.77,203.69) 82.01,203.64 VD13.C 85.55,203.64 arc(85.79,203.6) 86,203.46 86.02,203.44 arc(86.22,203.3) 86.47,203.25 X2.2
KCLEAR+: length 12
  TOP w0.45: R49.2 80.5,145.47 ; R49.2 79.49,143.67 ; R49.2 78.49,145.47
  BOTTOM w1: 83.41,145.84 84.76,147.19 arc(84.96,147.33) 85.21,147.37 X2.13
KCLEAR-: length 15
  TOP w0.45: 58.91,139.75 R56.2 56.9,139.75
  TOP w0.5: R55.2 58.01,139.51 arc(57.98,139.64) R56.2
  TOP w1: X2.14 89.02,142.29 arc(88.77,142.25) 88.57,142.11 83.41,136.94
KCTRLTM+: length 17
  TOP w0.45: 78.49,127.05 R57.2 ; R57.2 79.49,125.25 ; R57.2 80.5,127.05
  BOTTOM w1: 83.41,128.06 83.41,130.97 arc(83.45,131.21) 83.59,131.42 89.2,137.03 arc(89.41,137.17) 89.65,137.21 X2.15
KCTRLTM-: length 22.6
  TOP w0.45: 58.91,121.34 R64.2 56.9,121.34
  TOP w0.5: R63.2 58.01,121.1 arc(57.98,121.23) R64.2
  TOP w1: 83.41,117.9 90.84,125.33 arc(90.98,125.54) 91.02,125.78 X2.16
KDR_COM: length 55.9
  TOP w0.45: VD11.A 76.81,32.52 ; VD11.A 75.46,31.17 ; VD11.A 76.81,29.82 ; VD11.A 78.16,31.17 ; VD9.A 76.81,50.3 ; VD9.A 76.81,47.6 ; VD9.A 78.16,48.95 ; VD9.A 75.46,48.95 ; C25.2 47.57,34.12 ; C25.2 47.57,30.76 ; C25.2 46.69,32.44 ; 47.68,47.04 DD6.20 46.25,47.67 ; 48.02,35.61 C27.2 48.9,34.59 ; VD12.A 78.16,37.52 ; VD12.A 76.81,36.17 ; VD12.A 76.81,38.87 ; VD12.A 75.46,37.52 ; 47.68,35.61 DD6.11 46.25,34.99 ; 47.63,48.56 C26.2 ; C26.2 47.63,50.61 ; C26.2 46.75,49.58 ; R36.1 61.67,29.9 ; R36.1 60.06,29.9 ; R36.1 60.87,30.93 ; 91.02,38.48 X3.13 ; X3.13 89.45,40.06 ; X3.13 91.02,41.64 ; X3.13 92.6,40.06 ; 48.9,48.07 C24.2 48.02,47.04 ; DD6.14 47.68,39.42 ; VD10.A 76.81,43.95 ; VD10.A 76.81,41.25 ; VD10.A 78.16,42.6 ; VD10.A 75.46,42.6 ; DD6.16 47.68,41.96
  BOTTOM w0.35: 89.2,40.06 X3.13 ; X3.13 91.02,38.23 ; X3.13 91.02,41.89 ; X3.13 92.85,40.06
  vias: v1(46.03,50.73) v1(45.94,33.07) v1(46.03,30.73) v1(47.43,48.13) v1(48.48,41.96) v1(48.48,39.42) v1(49.23,34.13) v1(51.83,45.53) v1(52.03,50.73) v1(52.29,36.62) v1(52.29,34.08) v1(52.26,30.49) v1(54.88,39.43) v1(55.47,44.5) v1(55.47,41.96) v1(55.47,33.71) v1(55.47,30.53) v1(59.28,50.22) v1(59.28,46.41) v1(59.28,42.6) v1(59.28,38.79) v1(59.28,36.25) v1(59.28,33.71) v1(59.28,29.9) v1(64.36,50.22) v1(64.36,45.14) v1(64.36,41.96) v1(64.36,38.79) v1(64.36,36.25) v1(64.36,33.71) v1(64.36,29.9) v1(71.34,50.22) v1(71.34,45.14) v1(71.34,41.96) v1(71.34,36.25) v1(71.34,32.44) v1(71.34,29.9) v1(78.96,49.58) v1(78.96,48.31) v1(78.96,43.23) v1(78.96,41.96) v1(78.96,38.15) v1(78.96,36.88) v1(78.96,31.8) v1(78.96,30.53) v1(82.77,45.77) v1(82.77,40.06) v1(82.77,34.34) v1(88.48,47.68) v1(88.48,42.6) v1(88.48,37.52) v1(88.48,32.44)
KLN_COM: length 55.9
  TOP w0.45: 48.02,97.84 C18.2 48.9,98.87 ; DD4.16 47.68,92.76 ; 75.46,81.97 VD7.A ; VD7.A 76.81,83.32 ; VD7.A 76.81,80.62 ; VD7.A 78.16,81.97 ; X3.3 92.6,90.86 ; X3.3 91.02,89.28 ; X3.3 91.02,92.44 ; X3.3 89.45,90.86 ; R24.1 60.87,81.73 ; R24.1 60.06,80.7 ; R24.1 61.67,80.7 ; 47.68,86.41 DD4.11 46.25,85.78 ; 47.68,97.84 DD4.20 46.25,98.47 ; VD5.A 78.16,99.75 ; VD5.A 76.81,98.4 ; VD5.A 75.46,99.75 ; VD5.A 76.81,101.1 ; 75.46,88.32 VD8.A ; VD8.A 78.16,88.32 ; VD8.A 76.81,86.97 ; VD8.A 76.81,89.67 ; 46.75,100.38 C17.2 ; C17.2 47.63,99.36 ; C17.2 47.63,101.41 ; VD6.A 76.81,94.75 ; VD6.A 78.16,93.4 ; VD6.A 76.81,92.05 ; VD6.A 75.46,93.4 ; DD4.14 47.68,90.22 ; 48.02,86.41 C15.2 48.9,85.39 ; 47.57,81.56 C16.2 ; C16.2 46.69,83.24 ; C16.2 47.57,84.92
  BOTTOM w0.45: X3.3 91.02,92.69 ; X3.3 89.2,90.86 ; X3.3 91.02,89.03 ; X3.3 92.85,90.86
  vias: v1(46.03,101.53) v1(45.94,83.87) v1(46.03,81.53) v1(47.62,98.93) v1(48.48,92.76) v1(48.48,90.22) v1(49.23,84.92) v1(51.83,96.33) v1(52.03,101.63) v1(52.29,85.78) v1(52.29,81.33) v1(52.93,90.22) v1(55.47,95.3) v1(55.47,92.76) v1(55.47,87.68) v1(55.47,84.51) v1(55.47,81.33) v1(59.28,101.02) v1(59.28,97.21) v1(59.28,93.4) v1(59.28,89.59) v1(59.28,87.05) v1(59.28,84.51) v1(59.28,80.7) v1(64.36,101.02) v1(64.36,95.94) v1(64.36,92.76) v1(64.36,89.59) v1(64.36,87.05) v1(64.36,84.51) v1(64.36,80.7) v1(71.34,101.02) v1(71.34,95.94) v1(71.34,92.76) v1(71.34,87.05) v1(71.34,83.24) v1(71.34,80.7) v1(78.96,100.38) v1(78.96,99.11) v1(78.96,94.03) v1(78.96,92.76) v1(78.96,88.95) v1(78.96,87.68) v1(78.96,82.6) v1(78.96,81.33) v1(82.77,96.57) v1(82.77,90.86) v1(82.77,85.14) v1(88.48,98.48) v1(88.48,93.4) v1(88.48,88.32) v1(88.48,83.24)
KPRD+: length 14.8
  TOP w1: X2.5 86.47,188.01 arc(86.22,187.97) 86.02,187.83 86,187.81 arc(85.79,187.67) 85.55,187.62 VD15.A 82.53,187.62 arc(82.29,187.67) 82.08,187.81 82.06,187.83 arc(81.86,187.97) 81.61,188.01 K3.6
KPRD-: length 20.4
  TOP w1: K3.7 73.88,186.11 arc(74.07,185.66) 74.52,185.47 79.33,185.47 arc(79.58,185.43) 79.78,185.29 81.56,183.51 arc(81.77,183.37) 82.01,183.32 VD15.C 85.55,183.32 arc(85.79,183.28) 86,183.14 86.02,183.12 arc(86.22,182.98) 86.47,182.93 X2.6
KPRM+: length 14.8
  TOP w1: K4.6 81.61,177.85 arc(81.86,177.81) 82.06,177.67 82.08,177.65 arc(82.29,177.51) 82.53,177.46 VD16.A 85.55,177.46 arc(85.79,177.51) 86,177.65 86.02,177.67 arc(86.22,177.81) 86.47,177.85 X2.7
KPRM-: length 20.4
  TOP w1: X2.8 86.47,172.77 arc(86.22,172.82) 86.02,172.96 86,172.98 arc(85.79,173.12) 85.55,173.16 VD16.C 82.01,173.16 arc(81.77,173.21) 81.56,173.35 79.78,175.13 arc(79.58,175.27) 79.33,175.31 74.52,175.31 arc(74.07,175.5) 73.88,175.95 K4.7
KPUSK+: length 11.6
  TOP w0.45: 78.45,162.61 R41.2 ; R41.2 80.46,162.61 ; R41.2 79.45,160.81
  BOTTOM w1: 83.41,157.9 83.77,157.53 X2.11
KPUSK-: length 13.2
  TOP w0.45: 58.87,156.9 R48.2 56.86,156.9
  TOP w0.5: R47.2 57.97,156.66 arc(57.94,156.79) R48.2
  TOP w1: 83.41,153.46 86.32,153.46 arc(86.56,153.41) 86.77,153.27 87.39,152.64 arc(87.6,152.5) 87.84,152.45 X2.12
KRXDR+: length 4.8
  TOP w0.5: FB9.2 87.74,48.95 arc(87.99,49) 88.19,49.14 89.09,50.03 arc(89.3,50.17) 89.54,50.22 X3.11
KRXDR-: length 6.3
  TOP w0.5: FB10.2 86.66,44 arc(86.81,44.36) 87.16,44.5 87.21,44.5 87.66,44.95 arc(87.87,45.09) 88.11,45.14 X3.12
KRXLN+: length 4.8
  TOP w0.5: 91.02,101.02 89.54,101.02 arc(89.3,100.97) 89.09,100.83 88.19,99.94 arc(87.99,99.8) 87.74,99.75 FB5.2
KRXLN-: length 6.3
  TOP w0.5: 91.02,95.94 88.11,95.94 arc(87.87,95.89) 87.66,95.75 87.21,95.3 87.16,95.3 arc(86.81,95.16) 86.66,94.8 FB6.2
KRXTM+: length 4.8
  TOP w0.5: X3.6 89.54,75.62 arc(89.3,75.57) 89.09,75.43 88.19,74.54 arc(87.99,74.4) 87.74,74.35 FB1.2
KRXTM-: length 6.3
  TOP w0.5: 91.02,70.54 88.11,70.54 arc(87.87,70.49) 87.66,70.35 87.21,69.9 87.16,69.9 arc(86.81,69.76) 86.66,69.4 FB2.2
KTM_COM: length 55.9
  TOP w0.45: 46.25,60.39 DD2.11 47.68,61.01 ; 75.46,62.92 VD4.A ; VD4.A 76.81,64.27 ; VD4.A 78.16,62.92 ; VD4.A 76.81,61.57 ; 47.68,72.44 DD2.20 46.25,73.07 ; VD2.A 76.81,69.35 ; VD2.A 78.16,68 ; VD2.A 75.46,68 ; VD2.A 76.81,66.65 ; 75.46,56.57 VD3.A ; VD3.A 76.81,57.92 ; VD3.A 78.16,56.57 ; VD3.A 76.81,55.22 ; 60.06,55.3 R12.1 ; R12.1 60.87,56.33 ; R12.1 61.67,55.3 ; 48.02,72.44 C9.2 48.9,73.47 ; 89.45,65.46 91.02,65.46 ; 91.02,65.46 91.02,63.88 ; 91.02,65.46 92.6,65.46 ; 91.02,65.46 91.02,67.04 ; 75.46,74.35 VD1.A ; VD1.A 78.16,74.35 ; VD1.A 76.81,75.7 ; VD1.A 76.81,73 ; 47.57,56.16 C7.2 ; C7.2 46.69,57.84 ; C7.2 47.57,59.52 ; 48.9,59.99 C6.2 48.02,61.01 ; 47.63,73.96 C8.2 ; C8.2 46.75,74.98 ; C8.2 47.63,76.01 ; DD2.16 47.68,67.36 ; DD2.14 47.68,64.82
  BOTTOM w0.45: 91.02,65.46 91.02,67.29 ; 91.02,65.46 91.02,63.63 ; 91.02,65.46 89.2,65.46 ; 91.02,65.46 92.85,65.46
  vias: v1(46.03,76.13) v1(45.94,58.47) v1(46.03,56.13) v1(47.62,73.53) v1(48.48,67.36) v1(48.48,64.82) v1(49.23,59.53) v1(51.83,70.93) v1(52.03,76.13) v1(52.29,60.38) v1(52.26,55.89) v1(52.93,64.82) v1(55.47,69.9) v1(55.47,67.36) v1(55.47,62.28) v1(55.47,55.93) v1(59.28,75.62) v1(59.28,71.81) v1(59.28,68) v1(59.28,64.19) v1(59.28,61.65) v1(59.28,59.11) v1(59.28,55.3) v1(64.36,75.62) v1(64.36,70.54) v1(64.36,67.36) v1(64.36,64.19) v1(64.36,61.65) v1(64.36,59.11) v1(64.36,55.3) v1(71.34,75.62) v1(71.34,70.54) v1(71.34,67.36) v1(71.34,61.65) v1(71.34,57.84) v1(71.34,55.3) v1(78.96,74.98) v1(78.96,73.71) v1(78.96,68.63) v1(78.96,67.36) v1(78.96,63.55) v1(78.96,62.28) v1(78.96,57.2) v1(78.96,55.93) v1(82.77,71.17) v1(82.77,65.46) v1(82.77,59.74) v1(88.48,73.08) v1(88.48,68) v1(88.48,62.92) v1(88.48,57.84)
KTXDR+: length 6.3
  TOP w0.5: FB12.2 86.66,36.12 arc(86.81,35.76) 87.16,35.61 87.21,35.61 87.66,35.17 arc(87.87,35.03) 88.11,34.98 X3.14
KTXDR-: length 5.1
  TOP w0.5: FB11.2 87.86,31.17 arc(88.3,30.99) 88.48,30.54 88.48,30.53 arc(88.67,30.08) 89.12,29.9 X3.15
KTXLN+: length 6.3
  TOP w0.5: 91.02,85.78 88.11,85.78 arc(87.87,85.83) 87.66,85.97 87.21,86.41 87.16,86.41 arc(86.81,86.56) 86.66,86.92 FB8.2
KTXLN-: length 5.1
  TOP w0.5: FB7.2 87.86,81.97 arc(88.3,81.79) 88.48,81.34 88.48,81.33 arc(88.67,80.88) 89.12,80.7 91.02,80.7
KTXTM+: length 6.3
  TOP w0.5: FB4.2 86.66,61.52 arc(86.81,61.16) 87.16,61.01 87.21,61.01 87.66,60.57 arc(87.87,60.43) 88.11,60.38 X3.9
KTXTM-: length 5.1
  TOP w0.5: X3.10 89.12,55.3 arc(88.67,55.48) 88.48,55.93 88.48,55.94 arc(88.3,56.39) 87.86,56.57 FB3.2
KWARN+: length 14.8
  TOP w1: K2.6 81.61,198.17 arc(81.86,198.13) 82.06,197.99 82.08,197.97 arc(82.29,197.83) 82.53,197.78 VD14.A 85.55,197.78 arc(85.79,197.83) 86,197.97 86.02,197.99 arc(86.22,198.13) 86.47,198.17 X2.3
KWARN-: length 20.4
  TOP w1: X2.4 86.47,193.09 arc(86.22,193.14) 86.02,193.28 86,193.3 arc(85.79,193.44) 85.55,193.48 VD14.C 82.01,193.48 arc(81.77,193.53) 81.56,193.67 79.78,195.45 arc(79.58,195.59) 79.33,195.63 74.52,195.63 arc(74.07,195.82) 73.88,196.27 K2.7
N42682_A1: length 106.3
  TOP w0.25: DD1.2 29.69,67.36 arc(29.45,67.41) 29.24,67.55 28.35,68.45 arc(28.21,68.65) 28.16,68.9 28.16,77.35 arc(28.21,77.59) 28.35,77.8 28.96,78.41 arc(29.07,78.59) R2.1 29.12,79.87 29.01,79.98 29.01,80.15 19.46,89.7 arc(19.32,89.9) 19.27,90.15 19.27,162.72 arc(19.22,162.96) 19.08,163.17 18.19,164.06 arc(17.98,164.2) 17.74,164.25 R4.2
N42682_A2: length 83.8
  TOP w0.25: R16.2 18.37,166.79 arc(18.61,166.74) 18.82,166.6 20.99,164.44 arc(21.13,164.23) 21.18,163.99 21.18,113.45 arc(21.22,113.21) 21.36,113 28.95,105.42 arc(29.07,105.23) 29.12,105.01 R14.1 arc(29.07,103.99) 28.96,103.81 28.35,103.2 arc(28.21,102.99) 28.16,102.75 28.16,94.3 arc(28.21,94.05) 28.35,93.85 29.24,92.95 arc(29.45,92.81) 29.69,92.76 DD3.2
N48487_A1: length 26.2
  TOP w0.25: 62.77,55.3 62.77,57.84 66,57.84 arc(66.24,57.89) 66.45,58.03 67.34,58.92 arc(67.55,59.06) 67.79,59.11 79.97,59.11 arc(80.21,59.06) 80.42,58.92 80.92,58.42 arc(81.06,58.21) 81.11,57.97 VD3.C
  TOP w0.5: FB3.1 VD3.C
N48487_A2: length 26.2
  TOP w0.25: VD7.C 81.11,83.37 arc(81.06,83.61) 80.92,83.81 80.42,84.32 arc(80.21,84.46) 79.97,84.51 67.79,84.51 arc(67.55,84.46) 67.34,84.32 66.45,83.43 arc(66.24,83.29) 66,83.24 62.77,83.24 62.77,80.7
  TOP w0.5: FB7.1 VD7.C
N48547_A1: length 25.9
  TOP w0.25: VD2.C 81.11,69.4 arc(81.06,69.64) 80.92,69.85 80.42,70.35 arc(80.21,70.49) 79.97,70.54 75.56,70.54 arc(75.31,70.49) 75.11,70.35 73.81,69.05 arc(73.6,68.91) 73.36,68.86 R6.1 R7.1 63.09,69.51 arc(63.04,69.72) 62.93,69.9 arc(62.81,70.08) 62.77,70.29 62.77,71.17
  TOP w0.5: FB2.1 VD2.C
N48547_A2: length 25.9
  TOP w0.25: VD6.C 81.11,94.8 arc(81.06,95.04) 80.92,95.25 80.42,95.75 arc(80.21,95.89) 79.97,95.94 75.56,95.94 arc(75.31,95.89) 75.11,95.75 73.81,94.45 arc(73.6,94.31) 73.36,94.26 R18.1 R19.1 63.09,94.91 arc(63.04,95.12) 62.93,95.3 arc(62.81,95.48) 62.77,95.69 62.77,96.57
  TOP w0.5: FB6.1 VD6.C
N48663_A1: length 24.1
  TOP w0.25: VD1.C 81.11,72.95 arc(81.06,72.71) 80.92,72.5 80.42,72 arc(80.21,71.86) 79.97,71.81 72.87,71.81 arc(72.63,71.86) 72.42,72 72.06,72.36 arc(71.85,72.5) 71.61,72.55 S1.3 66.89,72.55 66.89,72.76 arc(66.85,73) 66.71,73.21 66.39,73.53 arc(66.19,73.67) 65.94,73.71 62.77,73.71
  TOP w0.5: FB1.1 VD1.C
N48663_A2: length 24.1
  TOP w0.25: 62.77,99.11 65.94,99.11 arc(66.19,99.07) 66.39,98.93 66.71,98.61 arc(66.85,98.4) 66.89,98.16 66.89,97.95 S3.3 71.61,97.95 arc(71.85,97.9) 72.06,97.76 72.42,97.4 arc(72.63,97.26) 72.87,97.21 79.97,97.21 arc(80.21,97.26) 80.42,97.4 80.92,97.9 arc(81.06,98.11) 81.11,98.35 VD5.C
  TOP w0.5: FB5.1 VD5.C
N48667_A1: length 25.7
  TOP w0.25: 62.77,62.92 62.77,60.38 79.97,60.38 arc(80.21,60.43) 80.42,60.57 80.92,61.07 arc(81.06,61.28) 81.11,61.52 VD4.C
  TOP w0.5: FB4.1 VD4.C
N48667_A2: length 25.7
  TOP w0.25: 62.77,88.32 62.77,85.78 79.97,85.78 arc(80.21,85.83) 80.42,85.97 80.92,86.47 arc(81.06,86.68) 81.11,86.92 VD8.C
  TOP w0.5: FB8.1 VD8.C
N48675_A1: length 5
  TOP w0.25: S1.2 69.44,63.66 arc(69.48,63.9) 69.62,64.11 71.19,65.68 arc(71.39,65.82) 71.64,65.86 R6.2
N48675_A2: length 5.1
  TOP w0.25: R18.2 71.64,91.26 arc(71.39,91.22) 71.19,91.08 69.44,89.32 S3.2
N102211_A1: length 5
  TOP w0.25: 66.89,63.45 66.89,63.66 arc(66.85,63.9) 66.71,64.11 65.14,65.68 arc(64.94,65.82) 64.69,65.86 R7.2
N102211_A2: length 5.1
  TOP w0.25: R19.2 64.63,91.31 arc(64.88,91.27) 65.09,91.12 66.89,89.32 66.89,88.85
PUSK: length 7.9
  TOP w0.25: X1.A21 X1.C21 R44.1
RXDR: length 7.9
  TOP w0.25: X1.A8 X1.C8 R27.1
RXLN: length 9
  TOP w0.25: X1.A10 X1.C10 11.77,168.18 arc(11.97,168.32) 12.22,168.36 12.24,168.36 arc(12.48,168.41) 12.69,168.55 13.08,168.95 arc(13.2,169.12) R15.1
RXTM: length 7.9
  TOP w0.25: R3.1 X1.C12 X1.A12
TXDR: length 8.9
  TOP w0.25: R28.1 X1.C7 X1.A7
TXLN: length 9
  TOP w0.25: X1.A9 X1.C9 11.77,165.64 arc(11.97,165.78) 12.22,165.82 12.24,165.82 arc(12.48,165.87) 12.69,166.01 13.08,166.41 arc(13.2,166.58) R16.1
TXTM: length 23.2
  TOP w0.25: X1.C11 X1.A11 4.03,169.33 arc(3.58,169.14) 3.4,168.69 3.4,163.62 arc(3.58,163.17) 4.03,162.98 11.93,162.98 arc(12.17,163.03) 12.38,163.17 13.08,163.87 arc(13.2,164.04) R4.1
VISO_A1: length 54.1
  TOP w0.25: R11.1 58.64,60.38 arc(58.4,60.33) 58.19,60.19 55.84,57.84 C7.1
  TOP w0.5: DD2.19 50.39,71.17 arc(50.54,71.24) 50.6,71.39 C9.1 50.6,73.67 arc(50.65,73.91) 50.79,74.12 50.83,74.16 arc(50.97,74.37) 51.02,74.61 v1(51.02,74.98) C8.1 ; v1(49.12,57.84) C7.1 50.66,59.69 50.6,59.75 C6.1 50.6,62.07 arc(50.54,62.22) 50.39,62.28 DD2.12
  BOTTOM w0.5: v1(51.02,74.98) 47.47,74.98 arc(47.23,74.94) 47.02,74.8 46.13,73.9 arc(45.99,73.69) 45.94,73.45 45.94,61.28 arc(45.99,61.03) 46.13,60.83 v1(49.12,57.84)
